# EAGLE board PCB_proiect (EAGLE 9.7.0)
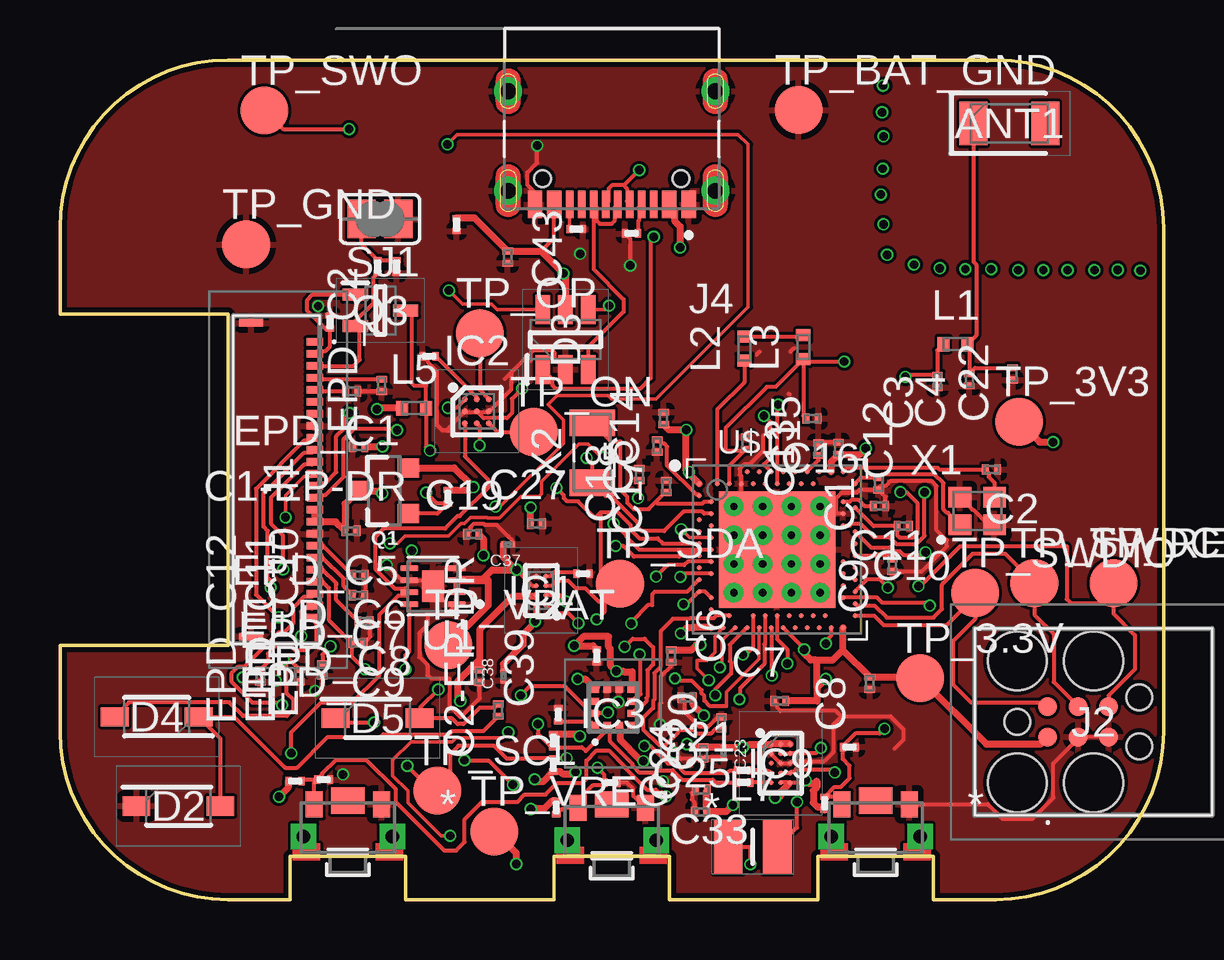
[diagram p0: board, top side]
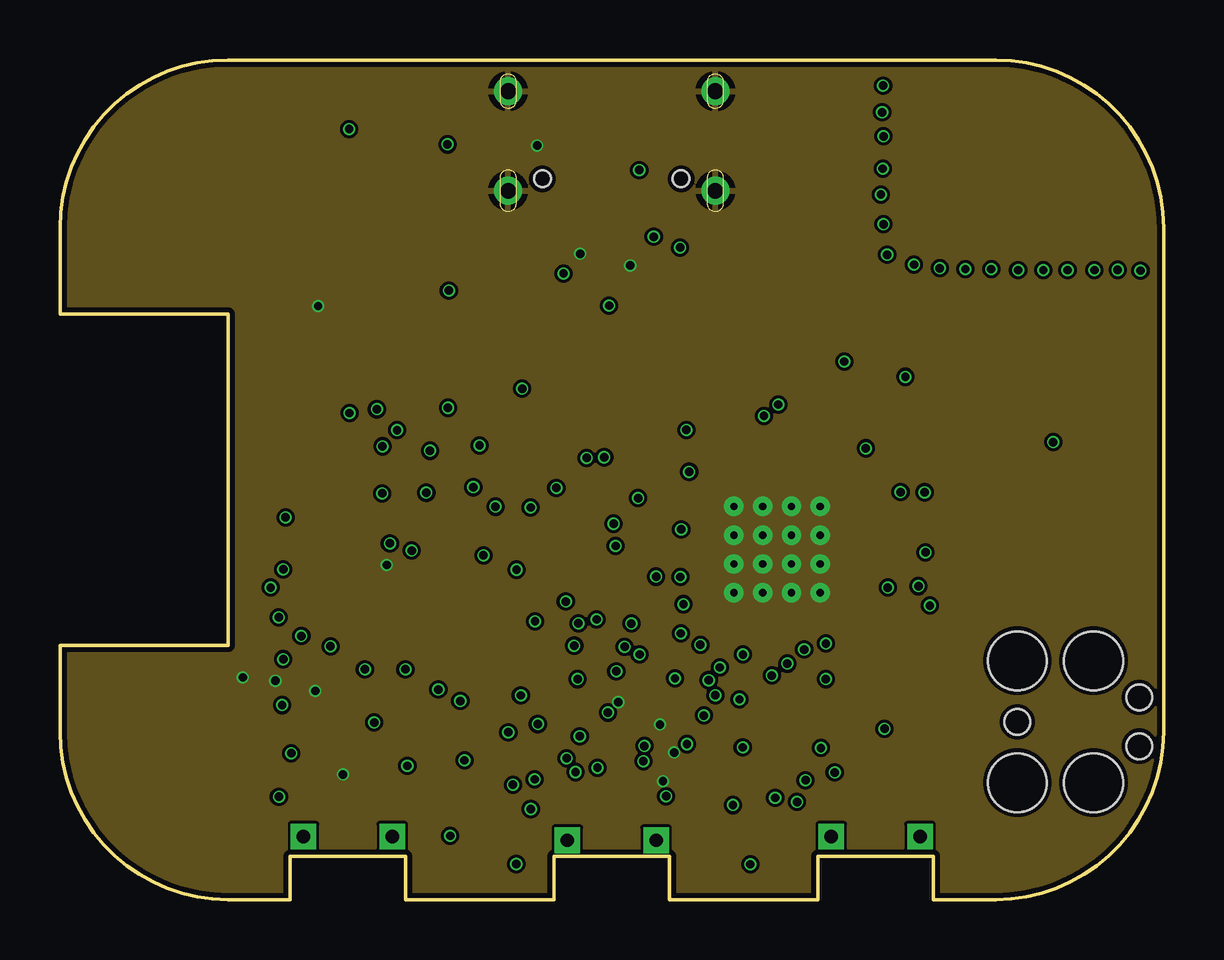
[diagram p1: board, inner layer Route2]
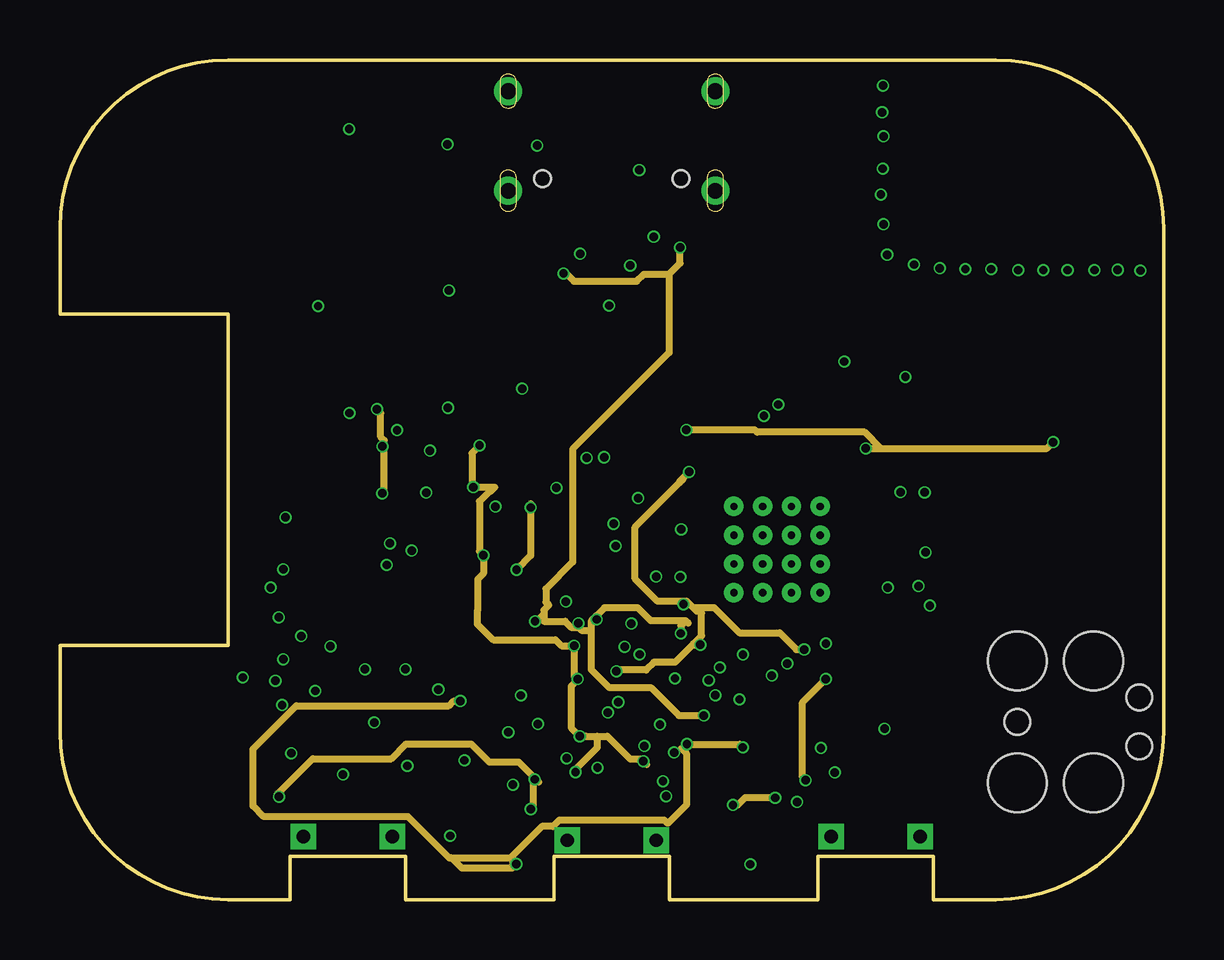
[diagram p2: board, inner layer Route15]
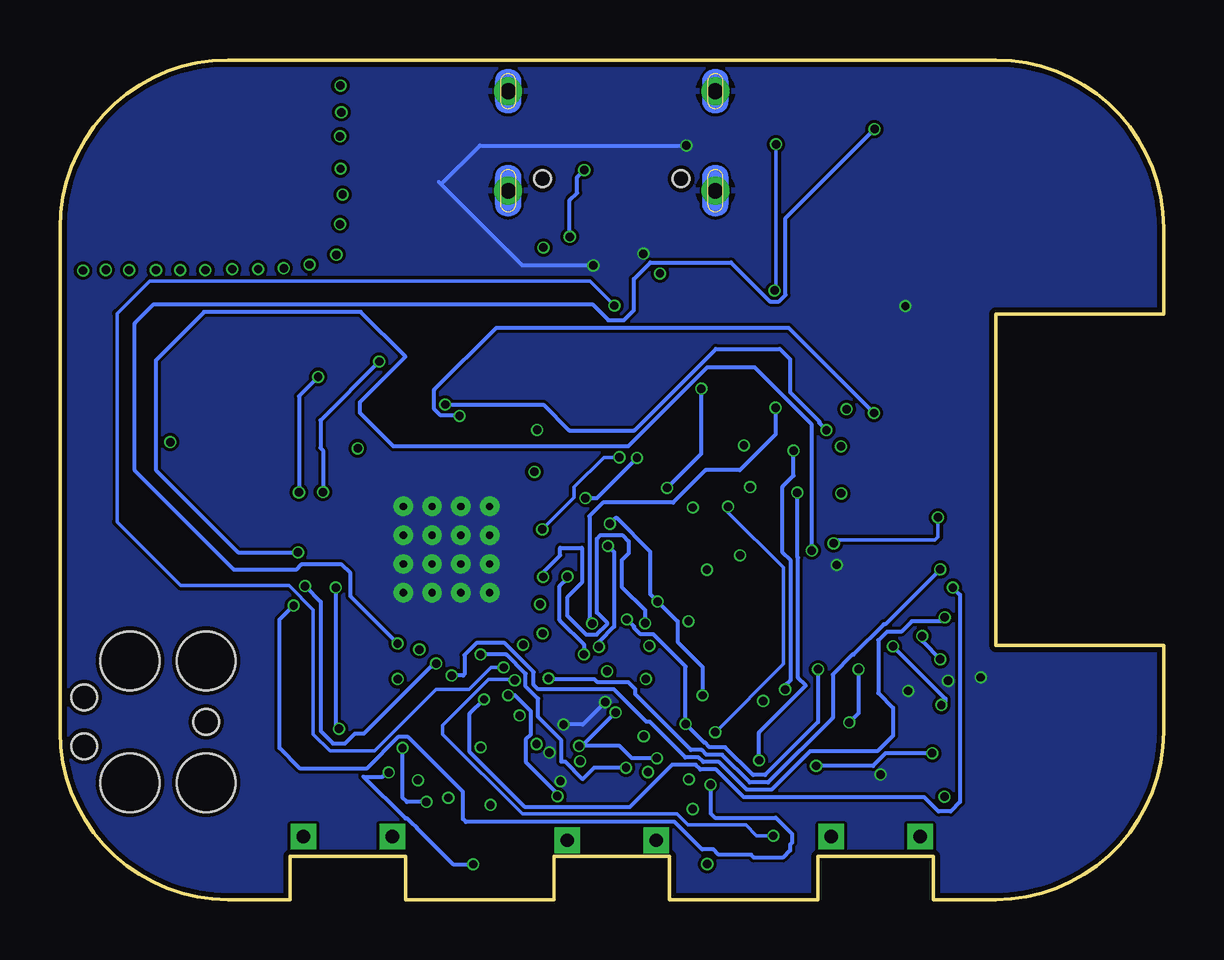
[diagram p3: board, bottom side, seen from below]

Size 46 x 35 mm. Coordinates in mm from the lower left corner, seen from the top.
Outline: 7,35 arc90 0,28 0,24.4 7,24.4 7,10.6 0,10.6 0,7 arc90 7,0 9.6,0 9.6,1.8 14.4,1.8 14.4,0 20.6,0 20.6,1.8 25.4,1.8 25.4,0 31.6,0 31.6,1.8 36.4,1.8 36.4,0 39,0 arc90 46,7 46,28 arc90 39,35 7,35
Copper layers (1*16): Top 0.035mm / dielectric 1.6mm / Bottom 0.035mm
Design rules "jlcpcb-2layers": minimum track width 5mil, minimum drill 0.3mm, track to track 5mil, track to pad 5mil, pad to pad 5mil, via to via 5mil, smd to smd 5mil, copper to edge 0.2mm, drill to drill 6mil, minimum pad ring 10mil, minimum via ring 3mil, stop-mask expansion 4mil, vias tented up to drill 0mil, thermal gap 10mil

## Footprints (pad centres in the part's own frame; a part is rotated, then mirrored left to right if it is on the bottom)
2450AT18B100E_ANTC3216X140N = smd 1.15 x 1.8: 1 -1.5,0; 2 1.5,0
NORDIC_NRF_3_RESC0201_L = smd 0.28 x 0.43: 1 -0.255,0; 2 0.255,0
GRM011R60J152KE01L_2_CAPC0201X13N = smd 0.22 x 0.23: 1 -0.185,0; 2 0.185,0
GRM011R60J152KE01L_1_0201 = smd 0.35 x 0.25: 1 0,0.275; 2 0,-0.275
ESP32_C6_LIBRARY_5_SOD3716X135N = smd 1.15 x 0.8: 1 -1.75,0; 2 1.75,0
ESP32_C6_LIBRARY_3_SOT95P280X145-6N = smd 1.2 x 0.6: 1 -1.25,0.95; 2 -1.25,0; 3 -1.25,-0.95; 4 1.25,-0.95; 5 1.25,0; 6 1.25,0.95
BQ25180YBGR_BGA8C40P2X4_100X155X50 = smd 0.2 x 0.2: A1 -0.2,0.6; A2 0.2,0.6; B1 -0.2,0.2; B2 0.2,0.2; C1 -0.2,-0.2; C2 0.2,-0.2; D1 -0.2,-0.6; D2 0.2,-0.6
DRV2605YZFR_BGA9C50P3X3_144X144X62 = smd 0.25 x 0.25: A1 -0.5,0.5; A2 0,0.5; A3 0.5,0.5; B1 -0.5,0; B2 0,0; B3 0.5,0; C1 -0.5,-0.5; C2 0,-0.5; C3 0.5,-0.5
BMA423_BMA423 = smd 0.3 x 0.35: 1 -0.75,-0.775; 2 -0.25,-0.775; 3 0.25,-0.775; 4 0.75,-0.775; 7 0.75,0.775; 8 0.25,0.775; 9 -0.25,0.775; 10 -0.75,0.775 | smd 0.35 x 0.3: 5 0.775,-0.25; 6 0.775,0.25; 11 -0.775,0.25; 12 -0.775,-0.25
RT6160AWSC_BGA15C40P3X5_140X230X60 = smd 0.216 x 0.216: A1 -0.4,0.8; A2 0,0.8; A3 0.4,0.8; B1 -0.4,0.4; B2 0,0.4; B3 0.4,0.4; C1 -0.4,0; C2 0,0; C3 0.4,0; D1 -0.4,-0.4; D2 0,-0.4; D3 0.4,-0.4; E1 -0.4,-0.8; E2 0,-0.8; E3 0.4,-0.8
503480-2400_5034802400 = smd 0.3 x 0.7: 1 -5.75,1.525; 2 -5.25,1.525; 3 -4.75,1.525; 4 -4.25,1.525; 5 -3.75,1.525; 6 -3.25,1.525; 7 -2.75,1.525; 8 -2.25,1.525; 9 -1.75,1.525; 10 -1.25,1.525; 11 -0.75,1.525; 12 -0.25,1.525; 13 0.25,1.525; 14 0.75,1.525; 15 1.25,1.525; 16 1.75,1.525; 17 2.25,1.525; 18 2.75,1.525; 19 3.25,1.525; 20 3.75,1.525; 21 4.25,1.525; 22 4.75,1.525; 23 5.25,1.525; 24 5.75,1.525 | smd 0.3 x 1: MP1 -6.54,-1.125; MP2 6.54,-1.125
TC2030-IDC_TC2030IDC = smd 0.783 x 0.783: 1 -0.953,-0.635; 2 -0.953,0.635; 3 0.317,-0.635; 4 0.317,0.635; 5 1.588,-0.635; 6 1.588,0.635 | hole 2.451: -2.223,-2.54; -2.223,2.54; 0.952,-2.54; 0.952,2.54 | hole 1.067: -2.223,0; 2.857,-1.016; 2.857,1.016
KH-TYPE-C-16P_KINGHELM_KH-TYPE-C-16P = smd 0.6 x 1.15: A1_B12 -3.2,4.725; A4_B9 -2.4,4.725; A9_B4 2.4,4.725; A12_B1 3.2,4.725 | smd 0.3 x 1.15: A5 -1.25,4.725; A6 -0.25,4.725; A7 0.25,4.725; A8 1.25,4.725; B5 1.75,4.725; B6 0.75,4.725; B7 -0.75,4.725; B8 -1.75,4.725 | drill 0.65 pad 1.05: SH1 -4.32,0; SH2 4.32,0; SH3 -4.32,4.15; SH4 4.32,4.15 | hole 0.7: -2.89,3.65; 2.89,3.65
NORDIC_NRF_2_RESC0402_L = smd 0.5 x 0.6: 1 -0.5,0; 2 0.5,0
MLP2016SR47MT0S1_INDC2016X100N = smd 1.2 x 2.2: 1 -1.028,0; 2 1.028,0
ESP32_C6_LIBRARY_4_ESP32_C6_LIBRARY_4_ESP32_C6_LIBRARY_4_ESP32_C6_LIBRARY_4_ESP32_WROVER_SPARKFUN-DISCRETESEMI_SOT23-3 = smd 0.8 x 0.9: 1 -0.95,-1; 2 0.95,-1; 3 0,1.1
ESP32_C6_LIBRARY_6_SOT65P210X110-3N = smd 1.05 x 0.5: 1 -1.05,0.65; 2 -1.05,-0.65; 3 1.05,0
ERA-1AEB3401C_0201 = smd 0.35 x 0.25: 1 0,0.275; 2 0,-0.275
CPF0201D7K68C1_0201 = smd 0.35 x 0.25: 1 0,0.275; 2 0,-0.275
ESP32_C6_LIBRARY_7_JUMPER_SJ = smd 1.168 x 1.6: 1 -0.762,0; 2 0.762,0
2025-10-22_07-23-44_LIBRARY_SW_EVP-AKE31A_PAN = smd 0.711 x 1.092: 1 -1.4,-0.972; 2 1.4,-0.972 | drill 0.559 pad 0.914 square: 3 -1.848,0.381; 4 1.848,0.381 | smd 1.397 x 1.092: 5 0,-1.124
HECTOR_WATCH_1_TP20R = smd 2 x 2: TP 0,0
ESP32_C6_LIBRARY_SON50P200X200X80-9N = smd 0.76 x 0.27: 1 -0.985,0.75; 2 -0.985,0.25; 3 -0.985,-0.25; 4 -0.985,-0.75; 5 0.985,-0.75; 6 0.985,-0.25; 7 0.985,0.25; 8 0.985,0.75 | smd 0.9 x 1.3: 9 0,0
NORDIC_NRF_4_AQFN50P700X700X85_HS-74N = smd 4.85 x 4.85: P$74 0,0 | drill 0.3 pad 0.6: P$75 -1.8,1.8; P$76 -0.6,1.8; P$77 0.6,1.8; P$78 1.8,1.8; P$79 -1.8,0.6; P$80 -0.6,0.6; P$81 0.6,0.6; P$82 1.8,0.6; P$83 -1.8,-0.6; P$84 -0.6,-0.6; P$85 0.6,-0.6; P$86 1.8,-0.6; P$87 -1.8,-1.8; P$88 -0.6,-1.8; P$89 0.6,-1.8; P$90 1.8,-1.8 | smd 0.2 x 0.2: P$A8 -1.25,3.25; P$A10 -0.75,3.25; P$A12 -0.25,3.25; P$A14 0.25,3.25; P$A16 0.75,3.25; P$A18 1.25,3.25; P$A20 1.75,3.25; P$A22 2.25,3.25; P$A23 2.75,3.25; P$AA24 3.25,-2.25; P$AB2 -2.75,-2.5; P$AC5 -2,-2.75; P$AC9 -1,-2.75; P$AC11 -0.5,-2.75; P$AC13 0,-2.75; P$AC15 0.5,-2.75; P$AC17 1,-2.75; P$AC19 1.5,-2.75; P$AC21 2,-2.75; P$AC24 3.25,-2.75; P$AD2 -2.75,-3.25; P$AD4 -2.25,-3.25; P$AD6 -1.75,-3.25; P$AD8 -1.25,-3.25; P$AD10 -0.75,-3.25; P$AD12 -0.25,-3.25; P$AD14 0.25,-3.25; P$AD16 0.75,-3.25; P$AD18 1.25,-3.25; P$AD20 1.75,-3.25; P$AD22 2.25,-3.25; P$AD23 2.75,-3.25; P$B1 -3.25,2.75; P$B3 -2.5,2.75; P$B5 -2,2.75; P$B7 -1.5,2.75; P$B9 -1,2.75; P$B11 -0.5,2.75; P$B13 0,2.75; P$B15 0.5,2.75; P$B17 1,2.75; P$B19 1.5,2.75; P$B24 3.25,2.75; P$C1 -3.25,2.25; P$D2 -2.75,2; P$D23 2.75,2; P$E24 3.25,1.75; P$F2 -2.75,1.5; P$F23 2.75,1.5; P$G1 -3.25,1.25; P$H2 -2.75,1; P$H23 2.75,1; P$J1 -3.25,0.75; P$J24 3.25,0.75; P$K2 -2.75,0.5; P$L1 -3.25,0.25; P$L24 3.25,0.25; P$M2 -2.75,0; P$N1 -3.25,-0.25; P$N24 3.25,-0.25; P$P2 -2.75,-0.5; P$P23 2.75,-0.5; P$R1 -3.25,-0.75; P$R24 3.25,-0.75; P$T2 -2.75,-1; P$T23 2.75,-1; P$U1 -3.25,-1.25; P$U24 3.25,-1.25; P$V23 2.75,-1.5; P$W1 -3.25,-1.75; P$W24 3.25,-1.75; P$Y2 -2.75,-2; P$Y23 2.75,-2
NORDIC_NRF_BT-XTAL_2016_N = smd 0.95 x 0.85: 1 -0.725,-0.575; 2 0.725,-0.575; 3 0.725,0.575; 4 -0.725,0.575
XTAL_ABS07-32.768KHZ-T = smd 1.1 x 1.9: 1 -1.25,0; 2 1.25,0

## Placement (x,y rotation side)
ANT1  2450AT18B100E_2450AT18B100E  [2450AT18B100E_ANTC3216X140N]  39.57,32.36 0 top
C1  12pF  [NORDIC_NRF_3_RESC0201_L]  34.12,17.33 90 top
C1-EP-DR  10uF  [NORDIC_NRF_3_RESC0201_L]  12.45,18.88 180 top
C2  12pF  [NORDIC_NRF_3_RESC0201_L]  38.83,17.93 180 top
C2-EP-DR  4.7uF/25V  [NORDIC_NRF_3_RESC0201_L]  18.27,7.9 90 top
C3  1pF  [NORDIC_NRF_3_RESC0201_L]  36.57,21.6 90 top
C4  1pF  [NORDIC_NRF_3_RESC0201_L]  37.9,21.67 90 top
C5  100nF  [NORDIC_NRF_3_RESC0201_L]  24.89,18.91 90 top
C6  4.7µF  [NORDIC_NRF_3_RESC0201_L]  25.48,10.15 270 top
C7  100nF  [NORDIC_NRF_3_RESC0201_L]  30,8.28 0 top
C8  100nF  [NORDIC_NRF_3_RESC0201_L]  33.75,9.02 90 top
C9  820pF  [NORDIC_NRF_3_RESC0201_L]  34.7,13.93 90 top
C10  N.C.  [NORDIC_NRF_3_RESC0201_L]  35.15,15.57 180 top
C11  100pF  [NORDIC_NRF_3_RESC0201_L]  34.16,16.41 180 top
C12  100nF  [NORDIC_NRF_3_RESC0201_L]  32.45,18.81 270 top
C13  N.C.  [NORDIC_NRF_3_RESC0201_L]  31.62,18.78 90 top
C14  4.7µF  [NORDIC_NRF_3_RESC0201_L]  25.16,20.06 90 top
C15  1.0µF  [NORDIC_NRF_3_RESC0201_L]  28.6,19.03 270 top
C16  47nF  [NORDIC_NRF_3_RESC0201_L]  31.35,20.05 180 top
C17  12pF  [NORDIC_NRF_3_RESC0201_L]  25.27,17.22 90 top
C18  12pF  [NORDIC_NRF_3_RESC0201_L]  24.15,17.72 90 top
C19  100nF  [NORDIC_NRF_3_RESC0201_L]  17.2,15.23 0 top
C20  4.7µF  [NORDIC_NRF_3_RESC0201_L]  27.57,7.36 90 top
C21  100nF  [NORDIC_NRF_3_RESC0201_L]  26.14,8.42 180 top
C22  N.C.  [NORDIC_NRF_3_RESC0201_L]  39.71,21.91 90 top
C23  0.1uF  [GRM011R60J152KE01L_2_CAPC0201X13N]  27.67,6.14 270 top
C24  10uF  [NORDIC_NRF_3_RESC0201_L]  26.82,6.11 90 top
C25  22uF  [NORDIC_NRF_3_RESC0201_L]  26.7,3.66 0 top
C27  0.1uF  [NORDIC_NRF_3_RESC0201_L]  19.86,15.67 0 top
C29  1uF  [GRM011R60J152KE01L_1_0201]  32.91,6.36 270 top
C30  1uF  [GRM011R60J152KE01L_1_0201]  10.99,5 270 top
C31  1uF  [GRM011R60J152KE01L_1_0201]  22.97,4.87 270 top
C32  1uF  [GRM011R60J152KE01L_1_0201]  15.39,22.65 90 top
C33  22uF  [NORDIC_NRF_3_RESC0201_L]  26.73,4.58 180 top
C34  0.1uF  [GRM011R60J152KE01L_1_0201]  22.37,10.16 180 top
C37  1uF  [GRM011R60J152KE01L_2_CAPC0201X13N]  18.67,14.82 180 top
C38  1uF  [GRM011R60J152KE01L_2_CAPC0201X13N]  18.49,9.31 90 top
C39  10uF  [NORDIC_NRF_3_RESC0201_L]  17.49,9.31 270 top
C42  0.1uF  [GRM011R60J152KE01L_1_0201]  16.53,28.14 0 top
C43  4.7uF  [NORDIC_NRF_3_RESC0201_L]  18.66,26.78 270 top
D2  ESP32_C6_LIBRARY_5_MBR0530  [ESP32_C6_LIBRARY_5_SOD3716X135N]  4.94,3.9 0 top
D3  ESP32_C6_LIBRARY_3_USBLC6-2SC6Y  [ESP32_C6_LIBRARY_3_SOT95P280X145-6N]  21.07,23.34 90 top
D4  ESP32_C6_LIBRARY_5_MBR0530  [ESP32_C6_LIBRARY_5_SOD3716X135N]  4.03,7.62 180 top
D5  ESP32_C6_LIBRARY_5_MBR0530  [ESP32_C6_LIBRARY_5_SOD3716X135N]  13.24,7.56 0 top
EPD_C1  1uF/50V  [NORDIC_NRF_3_RESC0201_L]  12.16,21.19 180 top
EPD_C2  1uF/50V  [NORDIC_NRF_3_RESC0201_L]  13.41,21.43 90 top
EPD_C5  0.1uF/50V  [NORDIC_NRF_3_RESC0201_L]  12.13,15.37 180 top
EPD_C6  1uF/50V  [NORDIC_NRF_3_RESC0201_L]  12.46,13.52 180 top
EPD_C7  1uF/50V  [NORDIC_NRF_3_RESC0201_L]  12.45,12.68 179.3 top
EPD_C8  1uF/50V  [NORDIC_NRF_3_RESC0201_L]  12.67,11.59 180 top
EPD_C9  1uF/50V  [NORDIC_NRF_3_RESC0201_L]  12.42,10.7 180 top
EPD_C10  1uF/50V  [NORDIC_NRF_3_RESC0201_L]  10.94,9.58 90 top
EPD_C11  1uF/50V  [NORDIC_NRF_3_RESC0201_L]  9.98,9.33 90 top
EPD_C12  1uF/50V  [NORDIC_NRF_3_RESC0201_L]  8.35,9.32 90 top
IC1  BQ25180YBGR_BQ25180YBGR  [BQ25180YBGR_BGA8C40P2X4_100X155X50]  20.06,12.88 180 top
IC2  DRV2605YZFR_DRV2605YZFR  [DRV2605YZFR_BGA9C50P3X3_144X144X62]  17.38,20.35 0 top
IC3  BMA423_BMA423  [BMA423_BMA423]  23.06,8.01 0 top
IC9  RT6160AWSC_RT6160AWSC  [RT6160AWSC_BGA15C40P3X5_140X230X60]  30.04,5.68 0 top
J1  503480-2400_503480-2400  [503480-2400_5034802400]  9.1,17.5 270 top
J2  TC2030-IDC_TC2030-IDC  [TC2030-IDC_TC2030IDC]  42.13,7.41 0 top
J4  KH-TYPE-C-16P_KH-TYPE-C-16P  [KH-TYPE-C-16P_KINGHELM_KH-TYPE-C-16P]  23,33.7 180 top
L1  3.9nH  [NORDIC_NRF_2_RESC0402_L]  37.33,23.15 0 top
L2  10µH  [NORDIC_NRF_2_RESC0402_L]  28.53,22.97 90 top
L3  15nH  [NORDIC_NRF_2_RESC0402_L]  30.98,23.03 90 top
L5  68uH  [NORDIC_NRF_2_RESC0402_L]  14.76,20.48 0 top
L7  MLP2016SR47MT0S1_FTC252012SR47MBCA  [MLP2016SR47MT0S1_INDC2016X100N]  28.88,2.19 180 top
Q1  20V/4.2A/52mΩ/1.4W  [ESP32_C6_LIBRARY_4_ESP32_C6_LIBRARY_4_ESP32_C6_LIBRARY_4_ESP32_C6_LIBRARY_4_ESP32_WROVER_SPARKFUN-DISCRETESEMI_SOT23-3]  13.52,17.04 90 top
Q3  ESP32_C6_LIBRARY_6_SI1308EDL-T1-GE3  [ESP32_C6_LIBRARY_6_SOT65P210X110-3N]  13.36,24.56 0 top
R1  0  [ERA-1AEB3401C_0201]  28.5,5.38 90 top
R1_EP_DR  0.47  [CPF0201D7K68C1_0201]  13.24,26.38 0 top
R1_PWR_EPD  10K  [CPF0201D7K68C1_0201]  16.16,16.79 180 top
R1_USB  5K1  [CPF0201D7K68C1_0201]  23.82,27.77 90 top
R2  0  [ERA-1AEB3401C_0201]  28.5,4.88 90 top
R2_EP_DR  10K  [CPF0201D7K68C1_0201]  11.26,24.07 0 top
R2_USB  5K1  [CPF0201D7K68C1_0201]  21.52,27.95 90 top
R3  0  [ERA-1AEB3401C_0201]  20.77,7.71 0 top
R5  10k  [CPF0201D7K68C1_0201]  9.8,4.94 270 top
R7  10k  [CPF0201D7K68C1_0201]  31.88,4.01 0 top
R8  10k  [CPF0201D7K68C1_0201]  20.69,3.83 180 top
R9  10K  [ERA-1AEB3401C_0201]  21.8,13.58 270 top
R17  3K3  [ERA-1AEB3401C_0201]  20.56,5.61 180 top
R18  3K3  [ERA-1AEB3401C_0201]  20.56,6.63 0 top
R_TYPE_SEL  2.2  [CPF0201D7K68C1_0201]  14.03,26.38 180 top
SJ1  0  [ESP32_C6_LIBRARY_7_JUMPER_SJ]  13.34,28.37 180 top
SW_DN  2025-10-22_07-23-44_LIBRARY_EVP-AKE31ASW_EVP-AKE31A_PAN  [2025-10-22_07-23-44_LIBRARY_SW_EVP-AKE31A_PAN]  34,3 180 top
SW_ENT  2025-10-22_07-23-44_LIBRARY_EVP-AKE31ASW_EVP-AKE31A_PAN  [2025-10-22_07-23-44_LIBRARY_SW_EVP-AKE31A_PAN]  23,2.85 180 top
SW_UP  2025-10-22_07-23-44_LIBRARY_EVP-AKE31ASW_EVP-AKE31A_PAN  [2025-10-22_07-23-44_LIBRARY_SW_EVP-AKE31A_PAN]  12,3 180 top
TP_3.3V  HECTOR_WATCH_1_TPTP20R  [HECTOR_WATCH_1_TP20R]  35.86,9.22 0 top
TP_3V3  HECTOR_WATCH_1_TPTP20R  [HECTOR_WATCH_1_TP20R]  39.98,19.92 0 top
TP_BAT_GND  HECTOR_WATCH_1_TPTP20R  [HECTOR_WATCH_1_TP20R]  30.79,32.91 0 top
TP_GND  HECTOR_WATCH_1_TPTP20R  [HECTOR_WATCH_1_TP20R]  7.76,27.31 0 top
TP_ON  HECTOR_WATCH_1_TPTP20R  [HECTOR_WATCH_1_TP20R]  19.75,19.49 0 top
TP_OP  HECTOR_WATCH_1_TPTP20R  [HECTOR_WATCH_1_TP20R]  17.5,23.61 0 top
TP_RESET  HECTOR_WATCH_1_TPTP20R  [HECTOR_WATCH_1_TP20R]  43.91,13.19 0 top
TP_SCL  HECTOR_WATCH_1_TPTP20R  [HECTOR_WATCH_1_TP20R]  15.73,4.54 0 top
TP_SDA  HECTOR_WATCH_1_TPTP20R  [HECTOR_WATCH_1_TP20R]  23.34,13.17 0 top
TP_SWDCLK  HECTOR_WATCH_1_TPTP20R  [HECTOR_WATCH_1_TP20R]  40.62,13.19 0 top
TP_SWDIO  HECTOR_WATCH_1_TPTP20R  [HECTOR_WATCH_1_TP20R]  38.15,12.78 0 top
TP_SWO  HECTOR_WATCH_1_TPTP20R  [HECTOR_WATCH_1_TP20R]  8.53,32.89 0 top
TP_VBAT  HECTOR_WATCH_1_TPTP20R  [HECTOR_WATCH_1_TP20R]  16.19,10.61 0 top
TP_VREG  HECTOR_WATCH_1_TPTP20R  [HECTOR_WATCH_1_TP20R]  18.11,2.84 0 top
U1  ESP32_C6_LIBRARY_MAX17048G+T10  [ESP32_C6_LIBRARY_SON50P200X200X80-9N]  15.55,13.06 180 top
U$1  NORDIC_NRF_4_NRF52840_QF  [NORDIC_NRF_4_AQFN50P700X700X85_HS-74N]  29.89,14.59 0 top
X1  32MHZ  [NORDIC_NRF_BT-XTAL_2016_N]  38.23,16.2 0 top
X2  ABSO7  [XTAL_ABS07-32.768KHZ-T]  22.18,18.63 90 top

## Library data of the parts
ANT1 = InkTime_v5; ARROW_PART_NUMBER: 2450AT18B100E; ARROW_PRICE-STOCK: https://www.arrow.com/en/products/2450at18b100e/johanson-dielectrics?utm_currency=USD&region=nac; DESCRIPTION: Antennas 2.45GHz ANTENNA; HEIGHT: 1.4mm; MANUFACTURER_NAME: JOHANSON TECHNOLOGY; MANUFACTURER_PART_NUMBER: 2450AT18B100E; MOUSER_PART_NUMBER: 609-2450AT18B100E; MOUSER_PRICE-STOCK: https://www.mouser.co.uk/ProductDetail/Johanson-Technology/2450AT18B100E?qs=yCnrNFeXz%252Bh5MFsFIXGZGA%3D%3D
C1 C1-EP-DR C2 C2-EP-DR C3-C22 C24 C25 C27 C29-C34 C39 C42 C43 EPD_C1 EPD_C2 EPD_C5-EPD_C12 L1-L3 L5 R1 R1_EP_DR R1_PWR_EPD R1_USB R2 R2_EP_DR R2_USB R3 R5 R7-R9 R17 R18 R_TYPE_SEL SJ1 TP_3.3V TP_3V3 TP_BAT_GND TP_GND TP_ON TP_OP TP_RESET TP_SCL TP_SDA TP_SWDCLK TP_SWDIO TP_SWO TP_VBAT TP_VREG U$1 X1 = InkTime_v5
C23 C37 C38 = InkTime_v5; AVAILABILITY: In Stock; CHECK_PRICES: https://www.snapeda.com/parts/GRM011R60J152KE01L/Murata/view-part/?ref=eda; DESCRIPTION: SMD Capacitor X5R(EIA) with Capacitance: 1500pF Tol. 10%. Rated Voltage: 6.3Vdc; MF: Murata; MP: GRM011R60J152KE01L; PACKAGE: 0201 Murata; PRICE: None; SNAPEDA_LINK: https://www.snapeda.com/parts/GRM011R60J152KE01L/Murata/view-part/?ref=snap
D2 D4 D5 = InkTime_v5; AVAILABILITY: In Stock; CHECK_PRICES: https://www.snapeda.com/parts/MBR0530/Onsemi/view-part/?ref=eda; DESCRIPTION: Diode Schottky 30 V 500mA Surface Mount SOD-123; MF: ON Semiconductor; MP: MBR0530; PACKAGE: SOD-123-2 ON Semiconductor; PRICE: None; PURCHASE-URL: https://www.snapeda.com/api/url_track_click_mouser/?unipart_id=179458&manufacturer=ON Semiconductor&part_name=MBR0530&search_term=None; SNAPEDA_LINK: https://www.snapeda.com/parts/MBR0530/Onsemi/view-part/?ref=snap
D3 = InkTime_v5; AVAILABILITY: In Stock; CHECK_PRICES: https://www.snapeda.com/parts/USBLC6-2SC6Y/STMicroelectronics/view-part/?ref=eda; DESCRIPTION: 17V Clamp 5A (8/20µs) Ipp Tvs Diode Surface Mount SOT-23-6; MF: STMicroelectronics; MP: USBLC6-2SC6Y; PACKAGE: SOT-23-6 STMicroelectronics; PRICE: None; SNAPEDA_LINK: https://www.snapeda.com/parts/USBLC6-2SC6Y/STMicroelectronics/view-part/?ref=snap
IC1 = InkTime_v5; ARROW_PART_NUMBER: BQ25180YBGR; ARROW_PRICE-STOCK: https://www.arrow.com/en/products/bq25180ybgr/texas-instruments?utm_currency=USD&region=nac; DESCRIPTION: Charger IC Lithium Ion/Polymer, Lithium Iron Phosphate 8-DSBGA (1.6x1.1); HEIGHT: 0.5mm; MANUFACTURER_NAME: Texas Instruments; MANUFACTURER_PART_NUMBER: BQ25180YBGR; MOUSER_PART_NUMBER: 595-BQ25180YBGR; MOUSER_PRICE-STOCK: https://www.mouser.co.uk/ProductDetail/Texas-Instruments/BQ25180YBGR?qs=doiCPypUmgEWjAK%252BJAX6Tw%3D%3D
IC2 = InkTime_v5; ARROW_PART_NUMBER: DRV2605YZFR; ARROW_PRICE-STOCK: https://www.arrow.com/en/products/drv2605yzfr/texas-instruments?region=nac; DESCRIPTION: Haptic Driver for ERM/LRA with Built-In Library and Smart Loop Architecture; HEIGHT: 0.625mm; MANUFACTURER_NAME: Texas Instruments; MANUFACTURER_PART_NUMBER: DRV2605YZFR
IC3 = InkTime_v5; ARROW_PART_NUMBER: BMA423; ARROW_PRICE-STOCK: https://www.arrow.com/en/products/bma423/bosch; DESCRIPTION: Accelerometers Triaxial low-g 12bit Acceleration Sensor; HEIGHT: 1mm; MANUFACTURER_NAME: BOSCH; MANUFACTURER_PART_NUMBER: BMA423; MOUSER_PART_NUMBER: 262-BMA423; MOUSER_PRICE-STOCK: https://www.mouser.co.uk/ProductDetail/Bosch-Sensortec/BMA423?qs=HXFqYaX1Q2xC%252BSgeGoX3mg%3D%3D
IC9 = InkTime_v5; DESCRIPTION: Buck-Boost Regulator Positive Output Step-Up/Step-Down I2C DC-DC Controller IC 15-WL-CSP (BSC) (1.4x2.3); HEIGHT: 0.6mm; MANUFACTURER_NAME: RICHTEK; MANUFACTURER_PART_NUMBER: RT6160AWSC; MOUSER_PART_NUMBER: 835-RT6160AWSC; MOUSER_PRICE-STOCK: https://www.mouser.co.uk/ProductDetail/Richtek/RT6160AWSC?qs=amGC7iS6iy%2FLd9PSoixZXQ%3D%3D
J1 = InkTime_v5; DESCRIPTION: FFC & FPC Connectors 0.5mm FPC RA SMT Dual Contact 24Ckt; HEIGHT: 1.87mm; MANUFACTURER_NAME: Molex; MANUFACTURER_PART_NUMBER: 503480-2400; MOUSER_PART_NUMBER: 538-503480-2400; MOUSER_PRICE-STOCK: https://www.mouser.co.uk/ProductDetail/Molex/503480-2400?qs=OAhjpuo3Vu7efIoxFh9AOw%3D%3D
J2 = InkTime_v5; DESCRIPTION: CABLE ADAPTER 6 POS; HEIGHT: 19mm; MANUFACTURER_NAME: Tag Connect; MANUFACTURER_PART_NUMBER: TC2030-IDC
J4 = InkTime_v5; AVAILABILITY: Not in stock; CHECK_PRICES: https://www.snapeda.com/parts/KH-TYPE-C-16P/Kinghelm/view-part/?ref=eda; MF: kinghelm; MP: KH-TYPE-C-16P; PACKAGE: None; PRICE: None; SNAPEDA_LINK: https://www.snapeda.com/parts/KH-TYPE-C-16P/Kinghelm/view-part/?ref=snap
L7 = InkTime_v5; DESCRIPTION: SMD / SMT Inductors (Coils), L=0.47?H, L x W x T :; HEIGHT: 1mm; JLCPCB: https://jlcpcb.com/partdetail/6763488-FTC252012SR47MBCA/C5832368; MANUFACTURER_NAME: TDK; MANUFACTURER_PART_NUMBER: FTC252012SR47MBCA
Q1 = InkTime_v5; PROD_ID: TRAN-14388
Q3 = InkTime_v5; AVAILABILITY: In Stock; CHECK_PRICES: https://www.snapeda.com/parts/SI1308EDL-T1-GE3/Vishay+Siliconix/view-part/?ref=eda; DESCRIPTION: Si1308EDL-T1-GE3 N-channel MOSFET Transistor, 1.5 A, 30 V, 3-Pin SC-70 | Siliconix / Vishay SI1308EDL-T1-GE3; MF: Vishay Siliconix; MP: SI1308EDL-T1-GE3; PACKAGE: SOT-323 Vishay Semiconductor; PRICE: None; PURCHASE-URL: https://www.snapeda.com/api/url_track_click_mouser/?unipart_id=274603&manufacturer=Vishay Siliconix&part_name=SI1308EDL-T1-GE3&search_term=None; SNAPEDA_LINK: https://www.snapeda.com/parts/SI1308EDL-T1-GE3/Vishay+Siliconix/view-part/?ref=snap
SW_DN SW_ENT SW_UP = InkTime_v5; COPYRIGHT: Copyright (C) 2025 Ultra Librarian. All rights reserved.; DIGI-KEY_PART_NUMBER_1: P123437TR-ND; DIGI-KEY_PART_NUMBER_2: P123437CT-ND; DIGI-KEY_PART_NUMBER_3: P123437DKR-ND; MANUFACTURER_NAME: Panasonic; MANUFACTURER_PART_NUMBER: EVP-AKE31A
U1 = InkTime_v5; AVAILABILITY: In Stock; CHECK_PRICES: https://www.snapeda.com/parts/MAX17048G+T10/Analog+Devices/view-part/?ref=eda; DESCRIPTION: 3µA 1-Cell/2-Cell Fuel Gauge with ModelGauge; MF: Analog Devices; MP: MAX17048G+T10; PACKAGE: TDFN-8 Maxim; PRICE: None; PURCHASE-URL: https://www.snapeda.com/api/url_track_click_mouser/?unipart_id=329239&manufacturer=Analog Devices&part_name=MAX17048G+T10&search_term=None; SNAPEDA_LINK: https://www.snapeda.com/parts/MAX17048G+T10/Analog+Devices/view-part/?ref=snap
X2 = Frequency-Source; CATEGORY: Crystal; DATASHEET: https://abracon.com/Resonators/ABS07.pdf; DESCRIPTION: 32.768 kHz ±20 ppm Crystal 12.5 pF 70 kOhms 2-SMD No Lead; FREQUENCY: 32.768 kHz; FREQUENCY_STABILITY: NA; LOAD_CAPACITANCE: 12.5 pF; MANUFACTURER: Abracon LLC; MPN: ABS07-32.768KHZ-T; OPERATING_TEMPERATURE: -40°C ~ 85°C; PACKAGE_SIZE: 2-SMD No Lead; PACKAGE_TYPE: Surface Mount; PART_STATUS: Active; ROHS: Compliant; SERIES: ABS07; SUBCATEGORY: Oscillators; TOLERANCE: ±20 ppm; TYPE: Resonators

## Nets
3V3: C6.1 C7.2 C8.2 C12.2 C14.1 C19.2 C25.2 C33.1 C34.2 IC2.C2 IC3.3 IC3.7 IC3.10 IC9.E2 IC9.E3 J2.1 Q1.2 R1_PWR_EPD.2 R5.2 R7.2 R8.2 R17.1 R18.1 TP_3.3V.TP TP_3V3.TP U$1.P$A22 U$1.P$AD14 U$1.P$AD23 U$1.P$B1 U$1.P$W1 U$1.P$Y2
ALERT: U1.5 U$1.P$J24
D+: D3.4 U$1.P$AD6
D-: D3.6 U$1.P$AD4
DN: D3.1 J4.A7 J4.B7
DP: D3.3 J4.A6 J4.B6
EPD_3V3: C1-EP-DR.1 EPD_C5.2 J1.15 J1.16 L5.1 Q1.3
EPD_BUSY: J1.9 U$1.P$AD12
EPD_CS: J1.12 U$1.P$K2
EPD_DC: J1.11 U$1.P$AD10
EPD_RST: J1.10 U$1.P$AC11
GDR: J1.2 Q3.1 R2_EP_DR.2
GND: C1-EP-DR.2 C1.1 C2.1 C3.1 C4.1 C5.1 C6.2 C7.1 C8.1 C9.1 C10.1 C11.1 C12.1 C13.2 C14.2 C15.1 C16.1 C17.2 C18.2 C19.1 C20.2 C21.2 C22.1 C23.2 C24.1 C25.1 C27.2 C29.1 C30.1 C31.1 C32.1 C33.2 C34.1 C37.1 C38.1 C39.2 C42.2 C43.2 D2.1 D3.2 EPD_C1.1 EPD_C2.1 EPD_C5.1 EPD_C6.1 EPD_C7.1 EPD_C8.1 EPD_C9.1 EPD_C10.1 EPD_C11.1 EPD_C12.1 IC1.D2 IC2.B1 IC2.B3 IC3.8 IC3.9 IC9.B1 IC9.C2 IC9.C3 J1.8 J1.17 J1.MP1 J1.MP2 J2.3 J2.5 J4.A1_B12 J4.A12_B1 J4.SH1 J4.SH2 J4.SH3 J4.SH4 R1_USB.1 R2_EP_DR.1 R2_USB.2 R3.1 R9.1 R_TYPE_SEL.1 SJ1.1 SW_DN.1 SW_ENT.1 SW_UP.1 TP_BAT_GND.TP TP_GND.TP U1.1 U1.4 U1.6 U1.9 U$1.P$74 U$1.P$75 U$1.P$76 U$1.P$77 U$1.P$78 U$1.P$79 U$1.P$80 U$1.P$81 U$1.P$82 U$1.P$83 U$1.P$84 U$1.P$85 U$1.P$86 U$1.P$87 U$1.P$88 U$1.P$89 U$1.P$90 U$1.P$B7 U$1.P$F23 X1.2 X1.4
HAPTIC_EN: IC2.A1 U$1.P$U1
IMU_INT1: IC3.5 U$1.P$N1
IMU_INT2: IC3.6 U$1.P$P2
LX1: IC9.B2 IC9.B3 L7.1
LX2: IC9.D2 IC9.D3 L7.2
MOSI: J1.14 U$1.P$B13
N$1: IC1.D1 R9.2
N$2: IC9.D1 R1.2
N$3: IC9.E1 R2.2
N$4: IC3.1 R3.2
N$5: C20.1 U$1.P$AC5
N$6: C2-EP-DR.2 D5.2 L5.2 Q3.3
N$7: C9.2 U$1.P$N24
N$8: C3.2 L1.1 U$1.P$H23
N$9: C11.2 U$1.P$D23
N$10: L2.1 U$1.P$B3
N$11: C2.2 U$1.P$A23 X1.3
N$12: C1.2 U$1.P$B24 X1.1
N$13: C13.1 U$1.P$A18
N$14: C10.2 C15.2 C16.2 L3.1 U$1.P$B5 U$1.P$E24
N$15: L2.2 L3.2
N$16: C5.2 U$1.P$C1
N$17: C17.1 U$1.P$D2 X2.2
N$18: C18.1 U$1.P$F2 X2.1
N$19: C2-EP-DR.1 D2.2 D4.1
N$20: R1_EP_DR.1 R_TYPE_SEL.2 SJ1.2
N$21: EPD_C2.2 J1.4
N$22: EPD_C6.2 J1.18
N$23: EPD_C1.2 J1.5
N$24: EPD_C7.2 J1.19
N$25: EPD_C8.2 J1.20
N$26: J4.A5 R1_USB.2
N$27: EPD_C10.2 J1.22
N$28: J4.B5 R2_USB.1
N$29: EPD_C12.2 J1.24
N$30: C32.2 IC2.A2
OUT+: IC2.A3 TP_OP.TP
OUT-: IC2.C3 TP_ON.TP
P0.04: U$1.P$J1
P0.09: U$1.P$L24
P0.13: C30.2 R5.1 SW_UP.2 U$1.P$AD8
P0.14: C31.2 R8.1 SW_ENT.2 U$1.P$AC9
P0.19: U$1.P$AC15
P0.20: U$1.P$AD16
P0.21: U$1.P$AC17
P0.22: U$1.P$AD18
P0.23: U$1.P$AC19
P0.24: U$1.P$AD20
P0.25: U$1.P$AC21
P0.26: U$1.P$G1
P0.27: U$1.P$H2
P0.28: U$1.P$B11
P0.29: U$1.P$A10
P0.30: U$1.P$B9
P0.31: U$1.P$A8
P1.01: Q1.1 R1_PWR_EPD.1 U$1.P$Y23
P1.02: C29.2 R7.1 SW_DN.2 U$1.P$W24
P1.03: U$1.P$V23
P1.04: U$1.P$U24
P1.05: U$1.P$T23
P1.06: U$1.P$R24
P1.07: U$1.P$P23
P1.09: U$1.P$R1
P1.10: U$1.P$A20
P1.11: U$1.P$B19
P1.12: U$1.P$B17
P1.13: U$1.P$A16
P1.14: U$1.P$B15
P1.15: U$1.P$A14
PMIC_INT: IC1.A1 U$1.P$T2
PREVGH: D5.1 EPD_C9.2 J1.21
PREVGL: D4.2 EPD_C11.2 J1.23
RESE: J1.3 Q3.2 R1_EP_DR.2
RESET: J2.6 TP_RESET.TP U$1.P$AC13
RF: ANT1.1 C4.2 C22.2 L1.2
SCK: J1.13 U$1.P$A12
SCL: IC1.B1 IC2.C1 IC3.12 R1.1 R17.2 TP_SCL.TP U1.7 U$1.P$M2
SDA: IC1.C1 IC2.B2 IC3.2 R2.1 R18.2 TP_SDA.TP U1.8 U$1.P$L1
SWDCLK: J2.4 TP_SWDCLK.TP U$1.P$AA24
SWDIO: J2.2 TP_SWDIO.TP U$1.P$AC24
SWO: TP_SWO.TP U$1.P$AD22
VBAT: C27.1 C37.2 IC1.C2 TP_VBAT.TP U1.2 U1.3
VBUS: C21.1 C38.2 C42.1 C43.1 D3.5 IC1.A2 J4.A4_B9 J4.A9_B4 U$1.P$AD2
VREG: C23.1 C24.2 C39.1 IC1.B2 IC9.A1 IC9.A2 IC9.A3 TP_VREG.TP

## Tracks (layer width: path | path; a pad name or v marks a point on that pad's centre or on a via)
3V3  (via drill 0.35)
  Top 0.156: IC9.E3 IC9.E2 | IC9.E3 31.49,4.88 | IC9.E3 30.39,4.83 | U$1.P$Y2 26.89,12.84 U$1.P$W1 26.11,12.31 v25.99,12.31 | IC2.C2 17.49,19.74 v17.49,18.93 | 30.03,4.29 29.98,4.24 v29.81,4.24
  Top 0.165: U$1.P$AD14 31.02,10.46 v31.02,10.42
  Top 0.3: 32.64,10.38 C8.2 35.81,9.28 TP_3.3V.TP 38.6,6.48 40.88,6.48 J2.1 | 32.64,10.38 U$1.P$AD23 | C7.2 31.56,8.28 31.56,8.83 | v33.59,18.81 33.34,18.55 C12.2 32.14,18.25 U$1.P$A22 | TP_3V3.TP 40.83,19.07 v41.4,19.07 | C14.1 25.38,19.58 v26.11,19.58 26.09,19.56 26.09,17.97 | IC3.7 23.85,8.82 23.85,9.49 23.51,9.49 23.49,9.52 v23.19,9.52 22.94,9.77 22.94,10.46 22.87,10.53 22.87,10.96 21.82,10.96 v21.44,10.58 22.23,10.58 C34.2 | Q1.2 16.43,17.99 v17.23,17.19 17.11,17.07 R1_PWR_EPD.2 | C19.2 17.65,15.04 v17.65,14.35 | IC3.3 23.36,7.19 23.36,6.66 24.17,5.85 24.24,5.85 v24.32,5.77 | U$1.P$B1 26.09,17.89 26.09,17.97 | R7.2 31.76,3.86 31.58,3.86 31.4,4.04 31.4,4.54 31.55,4.68 31.55,4.94 31.49,4.88 31.43,4.82 31.23,4.82 v31.07,4.97 | C6.1 26.31,10.41 26.53,10.62 v26.69,10.62 | R8.2 20.51,4.11 20.18,3.77 v19.62,3.77 | 31.56,8.83 31.56,9.94 31.51,9.99 | 31.56,8.83 v31.92,9.19 | 32.64,10.38 32.61,10.38 32.21,9.99 31.51,9.99 | 31.51,9.99 31.3,9.99 31.02,10.27 v31.02,10.42 | v9.13,4.28 9.53,4.68 R5.2 | v28.05,3.94 27.77,3.66 C25.2 26.95,4.55 C33.1 | v19.79,5.01 19.88,4.92 20.15,4.92 R17.1 20.85,5.34 20.94,5.24 21.38,5.24 21.45,5.31 v21.49,5.31 | 30.03,4.29 30.03,4.47 30.39,4.83 | R18.1 21.57,6.9 v21.66,6.81 v21.67,6.81 | v21.58,9.19 21.91,9.19 IC3.10 22.38,8.86 | 26.09,17.97 v26.23,17.83
  Route15 0.3: v33.59,18.81 34.22,18.81 | 26.65,12.03 26.74,11.94 26.74,10.99 26.4,10.66 26.4,10.65 | 26.65,12.03 26.51,12.17 27.26,12.17 28.32,11.12 30,11.12 30.7,10.42 v31.02,10.42 | v17.49,18.93 17.17,18.61 17.17,17.25 v17.23,17.19 18.13,17.19 17.95,17.01 17.9,17.01 17.49,16.6 17.49,14.51 v17.65,14.35 17.65,13.59 17.41,13.35 17.41,12.07 17.39,12.05 17.39,11.49 18.05,10.82 20.65,10.82 20.9,10.58 v21.44,10.58 21.44,9.3 21.58,9.16 | v26.11,19.58 28.96,19.58 29.06,19.48 33.55,19.48 34.22,18.81 | 25.98,12.43 26.13,12.43 26.54,12.03 26.65,12.03 | 26.4,10.65 26.44,10.61 26.45,10.62 v26.69,10.62 | 19.72,5.13 19.76,5.09 | 19.76,5.09 19.96,4.89 | 21.58,9.16 21.31,8.89 21.31,7.16 v21.66,6.81 v21.67,6.81 | 21.58,9.16 v21.58,9.19 | 19.72,5.13 19.12,5.73 17.89,5.73 17.14,6.48 14.43,6.48 13.81,5.87 10.54,5.87 9.04,4.37 v9.13,4.28 | v28.05,3.94 28.26,3.94 28.56,4.24 v29.81,4.24 | 19.72,5.13 19.72,3.87 v19.62,3.77 | 19.76,5.09 19.76,5.04 v19.79,5.01 | 34.22,18.81 41.14,18.81 v41.4,19.07 | 25.83,17.38 23.97,15.53 23.97,13.37 24.91,12.43 25.98,12.43 | 25.83,17.38 25.99,17.54 | 25.98,12.43 25.98,12.34 25.99,12.33 v25.99,12.31 | v31.07,4.97 30.95,5.1 30.95,8.22 v31.92,9.19 | 26.4,10.65 25.64,9.89 24.76,9.89 24.43,9.56 23.24,9.56 v23.19,9.52 | 24.46,5.62 24.24,5.85 23.77,5.85 22.82,6.81 22.4,6.81 | v21.49,5.31 21.49,5.43 22.4,6.34 22.4,6.81 | 21.93,6.81 v21.67,6.81 | v21.67,6.81 22.4,6.81 | 25.83,17.38 25.83,17.43 v26.23,17.83
ALERT  (via drill 0.35)
  Top 0.156: U1.5 14.56,14.45 v14.66,14.55 | U$1.P$J24 33.8,14.68 34.61,14.68 34.76,14.53 35,14.53 35.16,14.37 35.98,14.37 v36.08,14.47
  Bottom 0.156: v14.66,14.55 14.66,19.8 17.04,22.18 19.03,22.18 22.32,18.89 32.1,18.89 33.5,20.29 33.5,20.73 31.6,22.63 33.46,24.49 39.99,24.49 42.01,22.47 42.01,17.91 38.57,14.47 v36.08,14.47
D+  (via drill 0.35)
  Top 0.152: D3.4 22.72,24.59 v22.89,24.76 | U$1.P$AD6 27.6,10.8 27.6,9.82 27.5,9.72 v27.5,9.68
  Bottom 0.152: v22.89,24.76 23.92,25.79 42.26,25.79 43.62,24.43 43.62,15.75 40.96,13.09 36.45,13.09 35.44,12.08 35.44,6.89 34.75,6.2 32.88,6.2 30.32,8.76 28.95,8.76 28.03,9.68 v27.5,9.68
D-  (via drill 0.35)
  Top 0.152: v16.27,2.65 15.88,2.65 14.51,4.03 14.51,4.53 13.87,5.16 13.87,5.82 14.63,6.58 16.35,6.58 16.51,6.74 18.46,6.74 v18.69,6.97 | U$1.P$AD4 27.52,11.22 27.52,11.18 27.3,10.96 27.3,10.3 26.96,9.96 26.56,9.96 26.56,9.63 v27.04,9.14 | v18.15,16.38 18.34,16.38 20.98,19.02 20.98,20 20.35,20.63 20.72,21 22.84,21 22.98,20.86 24.84,20.86 28.68,24.7 28.68,31.48 28.27,31.89 16.56,31.89 v16.15,31.48 | D3.6 18.22,24.59 18,24.81 16.79,24.81 v16.21,25.39
  Bottom 0.152: v16.27,2.65 16.96,2.65 17.41,3.11 19.82,3.11 20.28,3.57 26.73,3.57 30.04,6.88 30.04,7.27 28.13,9.18 27.08,9.18 v27.04,9.14 | v18.15,16.38 18.15,16.14 15.85,13.84 15.85,9.81 v18.69,6.97 | v16.15,31.48 16.15,25.45 v16.21,25.39
DN  (via drill 0.35)
  Top 0.156: 23.5,29.78 23.63,29.65 23.63,29.09 J4.B7 | 23.5,29.78 23,29.78 22.87,29.65 22.87,29.09 J4.A7 | D3.1 20.54,21.67 20.54,21.43 20.68,21.29 24.18,21.29 24.62,21.73 24.62,27.5 v24.75,27.63 | v24.15,30.41 23.52,29.78 23.5,29.78
  Bottom 0.156: v24.75,27.63 24.75,29.15 24.45,29.45 24.45,30.11 v24.15,30.41
DP
  Top 0.156: J4.A6 23.13,28.86 23.13,28.3 23,28.17 22.5,28.17 22.37,28.3 22.37,28.86 J4.B6 22.25,26.26 23.5,25.01 23.5,24.51 22.02,23.03 D3.3
EPD_3V3  (via drill 0.35)
  Top 0.3: J1.15 J1.16 11.49,15.75 EPD_C5.2 11.88,16.5 Q1.3 13.32,17.04 v13.43,16.93 | C1-EP-DR.1 v13.43,18.88 v13.44,18.89 | v13.21,20.44 13.25,20.48 L5.1
  Route15 0.3: v13.43,16.93 13.52,17.02 13.52,18.97 | 13.52,18.97 v13.44,18.89 | 13.52,18.97 13.52,19.14 13.37,19.29 13.37,20.28 v13.21,20.44
EPD_BUSY  (via drill 0.35)
  Top 0.156: J1.9 10.51,19.13 10.18,19.13 8.17,17.12 8.17,12.71 v9.12,11.77 | U$1.P$AD12 29.67,11.31 v29.67,9.34
  Bottom 0.156: v9.12,11.77 9.29,11.59 10.5,11.59 10.93,11.16 11.53,11.16 11.89,10.81 11.89,8.61 11.28,8 11.28,6.83 11.93,6.18 14.73,6.18 16.34,4.57 17.37,4.57 18.53,5.73 19.18,5.73 19.38,5.93 19.93,5.93 21.41,7.41 21.55,7.41 22.91,8.76 26.06,8.76 26.25,8.95 26.25,9.48 27.46,10.69 28.64,10.69 29.14,10.19 29.14,9.39 29.19,9.34 v29.67,9.34
EPD_CS  (via drill 0.35)
  Top 0.152: J1.12 10.5,17.63 10.18,17.63 9.4,16.85 v9.4,15.93 | U$1.P$K2 26.24,15.09 v25.9,15.43 | v13.75,14.85 14.08,14.85 14.38,15.15 16.19,15.15 16.71,15.67 16.86,15.67 17.11,15.93 17.8,15.93 17.83,15.9 18.32,15.9 19.21,16.8 19.98,16.8 20.08,16.91 20.08,17.44 21.63,18.98 22.02,18.98 22.57,18.44 v22.68,18.44
  Bottom 0.152: v9.4,15.93 9.4,15.11 9.53,14.98 13.62,14.98 v13.75,14.85 | v25.9,15.43 24.57,16.75 24.57,17.2 23.33,18.44 v22.68,18.44
EPD_DC  (via drill 0.35)
  Top 0.152: U$1.P$AD10 29.14,10.03 27.77,8.66 27.77,8.06
  Top 0.156: J1.11 10.51,18.13 10.18,18.13 8.79,16.74 8.79,15.68 9.27,15.2 9.27,13.8 v9.31,13.77 | 27.77,8.06 27.1,8.06 26.86,8.3 26.86,8.48 26.74,8.6 26.74,8.72 26.35,9.11 25.75,9.11 v25.64,9.22
  Bottom 0.156: v9.31,13.77 11.6,11.47 11.66,11.47 12.92,10.21 12.96,10.21 13.79,9.38 13.79,7.57 16.48,4.88 17.24,4.88 18.4,6.04 19.05,6.04 19.25,6.24 19.7,6.24 22.02,8.55 22.02,8.77 22.31,9.06 23.59,9.06 23.72,9.19 25.6,9.19 v25.64,9.22
EPD_RST  (via drill 0.35)
  Top 0.156: J1.10 10.51,18.63 10.18,18.63 8.48,16.93 8.48,15.55 8.66,15.37 8.66,13.42 8.78,13.3 v8.78,13.01 | U$1.P$AC11 29.39,10.68 29.36,10.65 29.36,9.81 28.35,8.8 28.35,8.37 v28.32,8.35
  Bottom 0.156: v8.78,13.01 8.48,12.71 8.48,4.07 8.87,3.68 9.38,3.68 9.97,4.27 17.5,4.27 18.66,5.42 19.31,5.42 19.51,5.62 20.49,5.62 22.26,3.85 26.61,3.85 28.92,6.15 28.92,7.75 v28.32,8.35
GDR
  Top 0.156: J1.2 10.74,22.87 11.07,22.87 11.26,23.06 R2_EP_DR.2 11.06,23.8 10.3,24.55 10.3,25 10.52,25.21 Q3.1
GND  (via drill 0.35)
  Top 0.152: J2.3 42.5,6.78 J2.5 | U$1.P$F23 32.34,16.09 31.99,16.09 U$1.P$78
  Top 0.156: C11.1 34.41,16.78 C1.1 34.04,17.07 | X1.4 38.02,16.25 38.06,16.25 38.7,15.62 X1.2 | EPD_C8.1 12.93,10.95 EPD_C9.1 | EPD_C2.1 12.43,21.18 EPD_C1.1 | EPD_C6.1 12.72,12.7 EPD_C7.1 | U1.9 15.3,13.31 U1.6 14.26,13.31 v13.62,13.95 | U$1.P$75 28.39,16.69 U$1.P$B7 28.39,17.66 28.34,17.71 28.34,17.97 28.51,18.14 28.75,18.14 29.3,18.7 29.3,19.35 | 30.45,22.84 30.59,22.98 | 29.04,22.71 29.16,22.84 | SW_DN.1 38.68,3.97 39.28,3.37 40.53,3.37 41.41,4.25 41.41,5.68 42.5,6.78 | 18.68,15.14 | 18.68,15.14 18.2,15.62 17.71,15.62 17.68,15.65 17.23,15.65 17.11,15.53 17.11,15.39 C19.1 | C37.1 18.86,14.96 18.68,15.14 | SW_ENT.1 23.9,4.32 23.9,4.61 23.64,4.87 C31.1 | IC9.B1 IC9.C2 IC9.C3 30.53,5.77 31.86,5.77 32.23,6.14 32.23,7.3 32.57,7.64 | 32.57,7.64 34.62,7.64 35.16,7.1 35.16,6.66 34.8,6.3 | R1_USB.1 23.77,27.55 23.77,27.51 v23.77,26.43 | J4.A12_B1 19.8,29.47 19.48,29.79 19.48,30.31 19.89,30.72 v19.89,31.44 | U$1.P$80 U$1.P$74 | 34.04,17.07 33.33,17.07 33.2,16.95 32.57,16.95 32.34,16.72 32.34,16.46 32.34,16.09 | C32.1 15.34,22.43 15.34,22.39 15.71,22.01 15.71,19.79 15.94,19.56 16.09,19.56 | 16.09,19.56 16.32,19.56 | IC2.B1 16.83,20.3 | 16.83,20.3 16.09,19.56 | 19.62,22.77 19.73,22.89 20.5,22.89 20.62,22.77 20.62,22.54 D3.2 | 19.62,22.77 19.62,22.46 | 19.62,22.77 18.81,21.97 | 18.81,21.97 18.55,21.71 | 18.81,21.97 18.81,21.27 IC2.B3 17.83,20.3 16.83,20.3 | 32.57,7.64 32.35,7.86 30.03,7.86 29.9,7.99 29.9,8.12 C7.1 | 30.38,21.09 30.41,21.06 | 31.65,19.07 C12.1 | C9.1 35.92,13.68 36.97,14.72 36.97,14.97 36.54,15.4 36.54,17.24 36.34,17.44 34.62,17.44 34.42,17.24 34.2,17.24 34.04,17.07 | C6.2 25.48,9.75 25.05,9.32 25.05,8.21 25.01,8.17 v25.01,7.3
  Top 0.156: C21.2 26.04,8.27 26.04,7.83 26.65,7.22 27.03,7.22 27.43,7.62 C20.2 | C25.1 26.45,4.06 26.34,4.17 26.34,4.44 C33.2 | C23.2 26.92,5.96 C24.1 25.88,5.86 v25.6,6.13 | U1.1 16.14,11.92 15.32,11.92 15.32,11.44 14.98,11.11 14.98,10.11 15.32,9.78 15.32,9.36 15.47,9.21 16.23,9.21 16.23,8.07 16.7,7.6 17.49,8.39 C39.2
  Top 0.3: C13.2 31.65,19.07
  Bottom 0.156: v23.77,26.43 26.72,26.43 30.11,29.82 | 30.11,29.82 30.21,29.92 | 30.11,29.82 28.49,31.44 v19.89,31.44 | v23.27,8.23 24.2,7.3 v25.01,7.3
  other vias: 21.68,26.92 10.76,24.74 11.8,5.21 10.64,8.7 7.62,9.26 8.98,9.12 25.13,4.93
  pour Route2: -5.45,2.45 -0.98,-2.02 1.01,-2.02 1.03,-2.04 1.22,-2.22 51.17,-2.22 51.17,27.09 41.28,36.98 -5.46,36.98 -5.45,36.98
  pour Bottom: -0.54,-1.73 49.72,-1.73 49.72,28.85 40.95,37.62 -3.15,37.62 -3.15,0.88
  pour Top: 1.12,-2.58 51.29,-2.58 51.29,28.82 41.79,38.32 -1.55,38.32 -1.55,0.09
HAPTIC_EN  (via drill 0.35)
  Top 0.156: IC2.A1 16.74,20.71 16.73,20.71 16.53,20.5 v16.17,20.5 | U$1.P$U1 26.13,12.83 24.79,12.83 24.68,12.72 24.68,12.28 24.52,12.28 23.82,11.58 v23.82,11.51
  Bottom 0.156: v16.17,20.5 16.17,19.39 17.66,17.9 19.09,17.9 20.44,16.55 23.36,16.55 23.93,15.98 23.93,11.68 23.82,11.57 v23.82,11.51
IMU_INT1  (via drill 0.35, 0.35 pad 0.01)
  Top 0.156: IC3.5 23.95,7.88 24.07,7.88 24.44,8.25 24.44,8.4 24.49,8.45 24.49,9.56 24.73,9.8 24.73,10.51 24.37,10.87 23.87,10.87 v23.54,10.54 | U$1.P$N1 26.58,14.4 25.92,14.4 25.82,14.3 23.92,14.3 23.48,14.74 v23.16,14.74
  Bottom 0.156: v23.54,10.54 23.54,10.74 22.9,11.38 22.9,14.48 v23.16,14.74
IMU_INT2  (via drill 0.35 pad 0.01)
  Top 0.156: IC3.6 23.95,8.38 24.02,8.38 24.2,8.56 24.2,10.13 24.16,10.18 v24.16,10.22 | U$1.P$P2 26.17,14.09 26.02,13.94 25.33,13.94 v24.85,13.46
  Bottom 0.156: v24.85,13.46 24.85,13.39 25.17,13.07 25.17,11.63 24.16,10.62 v24.16,10.22
LX1  (via drill 0.35)
  Top 0.156: 30.4,6.08 IC9.B3 | 30.4,6.08 IC9.B2 | L7.1 30.72,3.01 v30.72,4.07 | 30.4,6.08 30.45,6.12 31.53,6.12 v31.72,6.32
  Bottom 0.156: v30.72,4.07 31.54,4.07 31.72,4.25 v31.72,6.32
LX2  (via drill 0.35)
  Top 0.156: IC9.D2 IC9.D3 30.5,5.34 30.58,5.34 30.67,5.43 32.16,5.43 v32.29,5.3 | L7.2 27.86,2.18 28.78,2.18 v28.78,1.47
  Bottom 0.156: v28.78,1.47 29.62,1.47 30.72,2.58 31.12,2.97 31.12,2.98 31.39,3.25 31.52,3.38 31.6,3.38 33.34,5.12 32.55,5.12 32.38,5.3 v32.29,5.3
MOSI  (via drill 0.35)
  Top 0.156: J1.14 10.74,16.87 11.07,16.87 11.82,17.62 11.82,19.19 12.19,19.56 12.19,19.64 13.98,19.64 v14.05,19.57 | U$1.P$B13 29.89,20.8 29.94,20.74 v29.94,20.63
  Bottom 0.156: v14.05,19.57 14.35,19.87 14.35,19.93 15.57,21.15 15.57,22.53 15.99,22.95 18.66,22.95 22.05,19.56 24.78,19.56 25.85,20.63 v29.94,20.63
N$1
  Top 0.156: R9.2 21.6,13.66 20.63,13.66 20.45,13.48 IC1.D1
N$2
  Top 0.156: R1.2 29.46,5.38 29.5,5.34 29.58,5.34 IC9.D1
N$3
  Top 0.156: R2.2 IC9.E1
N$4
  Top 0.156: R3.2 21.96,7.44 22.01,7.38 22.17,7.38 IC3.1
N$5
  Top 0.156: U$1.P$AC5 27.36,11.84 27.24,11.72 26.26,11.72 26.24,11.7 25.55,11.7 25.03,11.19 25.03,9.71 24.77,9.44 24.77,8.33 24.73,8.29 24.73,7.99 24.31,7.57 24.31,7.1 24.97,6.44 25.24,6.44 25.77,6.97 25.77,7.07 26.4,7.07 26.54,6.93 27.15,6.93 27.32,7.11 C20.1
N$6  (via drill 0.35)
  Top 0.156: Q3.3 14.67,24.3 14.67,21.52 14.78,21.41 15.27,21.41 L5.2 15.26,18.87 v15.42,18.71 | C2-EP-DR.2 18.11,7.99 17.49,7.99 16.82,7.32 16.58,7.32 16.34,7.56 D5.2 15.04,7.61 15.04,8.02 v15.77,8.75
  Bottom 0.156: v15.42,18.71 15.42,17.67 15.88,17.21 15.88,14.47 15.54,14.13 15.54,9.15 15.77,8.92 v15.77,8.75
N$7
  Top 0.156: C9.2 34.49,14.4 34.12,14.4 34.06,14.34 U$1.P$N24
N$8  (via drill 0.35)
  Top 0.156: L1.1 36.57,22.89 C3.2 35.3,21.86 v35.24,21.79 | U$1.P$H23 32.92,15.59 33,15.67 33.37,15.67 33.92,15.12 34.56,15.12 34.87,14.81 35.7,14.81 36.04,15.16 v36.04,16.98
  Bottom 0.156: v35.24,21.79 36.04,20.99 v36.04,16.98
N$9
  Top 0.156: U$1.P$D23 32.92,16.59 33,16.67 33.28,16.67 33.54,16.41 C11.2
N$10
  Top 0.156: L2.1 28.53,21.56 27.39,20.42 U$1.P$B3
N$11
  Top 0.156: X1.3 38.95,17.38 38.71,17.62 38.71,17.79 C2.2 36.65,17.93 36.57,18.01 32.81,18.01 U$1.P$A23
N$12
  Top 0.156: U$1.P$B24 33.38,17.59 C1.2 34.26,17.72 36.46,17.72 36.82,17.36 36.82,16.27 36.97,16.12 37.01,16.12 X1.1
N$13
  Top 0.156: C13.1 31.62,18.32 U$1.P$A18
N$14  (via drill 0.35)
  Top 0.156: U$1.P$E24 33.91,15.57 C10.2 34.89,15.19 34.99,15.1 35.58,15.1 35.75,15.27 35.75,16.51 35.28,16.98 v35.04,16.98 | L3.1 30.88,22.43 v32.7,22.43 | U$1.P$B5 27.89,18.07 C15.2 | 28.73,18.77 C15.2 | C15.2 28.55,18.72 27.74,18.72 27.74,19.65 29.46,21.37 29.82,21.37 L3.1 | L3.1 30.98,20.16 C16.2
  Bottom 0.156: v32.7,22.43 35.14,19.98 35.14,18.83 35.04,18.72 v35.04,16.98
N$15
  Top 0.156: L2.2 30.92,23.47 L3.2
N$16
  Top 0.152: U$1.P$C1 26.64,16.88
  Top 0.156: 26.64,16.88 26.54,16.88 25.31,18.1 25.31,18.88 25.19,19 25.05,19 C5.2
N$17
  Top 0.156: U$1.P$D2 26.86,16.59 26.78,16.51 24.91,16.51 24.87,16.55 24.87,16.61 | 25.12,16.96 C17.1 25.22,16.96 24.87,16.61 | X2.2 22.96,19.1 23.34,19.1 23.35,17.09 23.64,16.79 23.64,16.55 23.91,16.28 24.54,16.28 24.87,16.61
N$18  (via drill 0.35)
  Top 0.156: U$1.P$F2 26.86,16.09 26.78,16.17 25.99,16.17 25.18,15.36 24.25,15.36 24.1,15.51 24.1,15.69 22.98,16.82 22.75,16.82 X2.1 22.18,18.18 v21.95,18.41 | C18.1 24.15,16.79 v24.1,16.74
  Bottom 0.156: v24.1,16.74 23.62,16.74 v21.95,18.41
N$19
  Top 0.156: D2.2 6.69,6.71 D4.1 7.26,7.62 9.39,5.49 9.88,5.49 11.16,6.77 13.35,6.77 13.47,6.89 16.22,6.89 16.36,7.02 17.65,7.02 C2-EP-DR.1
N$20
  Top 0.156: SJ1.2 12.58,27.31 R1_EP_DR.1 R_TYPE_SEL.2
N$21
  Top 0.156: EPD_C2.2 10.69,21.68 J1.4
N$22
  Top 0.156: J1.18 10.98,14.75 EPD_C6.2
N$23
  Top 0.156: EPD_C1.2 10.69,21.19 J1.5
N$24
  Top 0.156: EPD_C7.2 11.82,13.05 11.82,13.38 10.95,14.25 J1.19
N$25
  Top 0.156: J1.20 10.95,13.75 11.51,13.19 11.51,13.13 11.51,13.12 11.51,12.49 EPD_C8.2
N$26
  Top 0.156: R1_USB.2 24.09,28.27 24.13,28.3 24.13,28.86 J4.A5
N$27  (via drill 0.35)
  Top 0.156: J1.22 10.51,12.63 10.18,12.63 9.74,12.19 9.74,11.52 9.36,11.15 9.14,11.15 7.71,9.72 7.43,9.72 7.16,9.45 7.16,9.07 8.03,8.2 9.17,8.2 v9.26,8.11 | v11.28,10.56 10.94,10.22 EPD_C10.2
  Bottom 0.156: v9.26,8.11 9.09,8.28 9.09,8.37 v11.28,10.56
N$28
  Top 0.152: R2_USB.1 J4.B5
N$29
  Top 0.156: J1.24 10.62,11.56 10.67,11.51 10.67,10.73 10.31,10.38 9.81,10.38 9.56,10.63 9.05,10.63 8.67,10.24 8.67,9.9 EPD_C12.2
N$30
  Top 0.156: C32.2 17.38,20.93 IC2.A2
N$31  (via drill 0.35)
  other vias: 34.31,33.93
N$32  (via drill 0.35)
  other vias: 34.27,32.82
N$33  (via drill 0.35)
  other vias: 34.33,31.82
N$34  (via drill 0.35)
  other vias: 34.3,30.47
N$35  (via drill 0.35)
  other vias: 34.22,29.39
N$36  (via drill 0.35)
  other vias: 34.33,28.15
N$37  (via drill 0.35)
  other vias: 34.48,26.88
N$38  (via drill 0.35)
  other vias: 35.6,26.47
N$39  (via drill 0.35)
  other vias: 36.67,26.32
N$40  (via drill 0.35)
  other vias: 37.74,26.28
N$41  (via drill 0.35)
  other vias: 38.82,26.28
N$42  (via drill 0.35)
  other vias: 39.94,26.24
N$43  (via drill 0.35)
  other vias: 40.99,26.24
N$44  (via drill 0.35)
  other vias: 42,26.24
N$45  (via drill 0.35)
  other vias: 43.12,26.24
N$46  (via drill 0.35)
  other vias: 44.09,26.25
N$47  (via drill 0.35)
  other vias: 45.04,26.22
OUT+
  Top 0.156: IC2.A3 17.74,20.99 17.74,21.02 17.5,21.25 TP_OP.TP
OUT-
  Top 0.156: TP_ON.TP 18.24,19.49 IC2.C3
P0.13  (via drill 0.35)
  Top 0.156: R5.1 10.13,5 C30.2 | C30.2 10.6,4.88 SW_UP.2 | U$1.P$AD8 28.03,10.73 28.02,10.73 27.92,10.63 27.92,9.93 27.97,9.88 27.97,9.43 27.32,8.77 v27.32,8.52 | C30.2 10.94,5.22 10.94,5.26 11.51,5.83 12.77,5.83 13.99,4.61 13.99,4.07 16.01,2.05 16.52,2.05 16.87,2.4 16.87,3.35 17.6,4.07 19.07,4.07 19.37,4.38 20.25,4.38 20.72,4.86 21.78,4.86 21.95,5.02 21.95,5.79 22.37,6.21 22.88,6.21 23.55,5.54 23.55,5.49 24.46,4.58 24.84,4.58 24.94,4.48 25.09,4.48 v25.27,4.3
  Bottom 0.156: v27.32,8.52 27.04,8.52 26.38,7.86 26.38,6.87 26.59,6.67 26.59,5.74 25.27,4.41 v25.27,4.3
P0.14  (via drill 0.35)
  Top 0.156: R8.1 20.88,3.75 20.96,3.75 21.03,3.82 SW_ENT.2 21.6,4.14 22.21,4.75 22.57,4.75 C31.2 22.7,5.2 v22.4,5.49 | U$1.P$AC9 28.89,10.51 28.5,10.12 28.5,10.18 v28.47,10.22
  Bottom 0.156: v22.4,5.49 23.73,5.49 24.21,5.02 24.94,5.74 25.1,5.74 25.1,6.63 26.07,7.61 26.07,8.37 26.59,8.88 26.59,9.41 27.39,10.22 v28.47,10.22
P1.01  (via drill 0.35)
  Top 0.156: Q1.1 15.73,16.09 R1_PWR_EPD.1 15.71,16.52 v15.27,16.96 | v16.86,5.8 17.86,5.8 v18.88,4.79 | U$1.P$Y23 34.06,12.59 34.25,12.4 36.12,12.4 v36.26,12.25
  Bottom 0.156: v16.86,5.8 16.86,6.97 14.91,8.92 15.23,9.24 15.23,14.25 15.27,14.29 v15.27,16.96 | v18.88,4.79 18.88,3.59 18.7,3.41 16.16,3.41 15.48,2.73 15.48,2.37 15.57,2.29 15.57,2.05 15.87,1.75 17.08,1.75 17.2,1.87 18.55,1.87 18.77,2.09 19.23,2.09 20.38,3.23 29.07,3.23 29.2,3.36 29.2,4.49 31.48,6.77 31.91,6.77 33.23,5.45 35.98,5.45 36.84,6.31 36.84,11.67 v36.26,12.25
P1.02  (via drill 0.35)
  Top 0.156: SW_DN.2 32.29,4.29 R7.1 32.29,4.69 32.55,4.69 32.92,5.06 32.92,5.58 32.63,5.86 C29.2 32.63,6.4 33.16,6.92 34.17,6.92 v34.37,7.12 | U$1.P$W24 33.65,13.35 34.15,13.35 v34.5,13
  Bottom 0.156: v34.37,7.12 34.5,7.25 v34.5,13
PMIC_INT  (via drill 0.35)
  Top 0.156: v25.86,13.45 26,13.59 U$1.P$T2 | IC1.A1 20.59,11.95 21.17,11.95 v21.61,11.51
  Bottom 0.156: v25.86,13.45 25.86,13.64 25.15,14.35 25.15,14.66 24.24,14.66 24.24,13.21 24.86,12.59 24.86,11.84 24.07,11.05 23.63,11.05 23.19,11.49 23.19,11.52 23.62,11.96 23.62,15.04 23.47,15.19 22.56,15.19 22.3,14.93 22.3,14.43 22.59,14.14 22.59,13.04 21.61,12.06 v21.61,11.51
PREVGH  (via drill 0.35)
  Top 0.156: J1.21 10.95,13.25 11.21,13 11.21,11.66 EPD_C9.2 12.16,10.14 v12.71,9.6 | v13.1,7.38 11.67,7.38 D5.1
  Bottom 0.156: v12.71,9.6 12.71,7.77 v13.1,7.38
PREVGL  (via drill 0.35)
  Top 0.156: J1.23 10.51,12.13 10.18,12.13 10.04,12 10.04,11.19 10.06,11.17 v10.06,10.99 | D4.2 2.89,8.22 7.05,8.22 7.63,7.65 9.45,7.65 9.72,7.92 9.72,8.34 9.44,8.62 9.44,9.89 v9.31,10.02 9.55,10.02 EPD_C11.2 9.85,9.59
  Bottom 0.156: v10.06,10.99 10.06,10.77 v9.31,10.02
RESE
  Top 0.156: J1.3 12.23,22.25 12.49,22.51 12.49,23.73 Q3.2 12.31,24.11 13.07,24.86 13.07,25.93 R1_EP_DR.2
RESET  (via drill 0.35)
  Top 0.156: v30.32,9.84 30.32,10.43 29.89,10.86 U$1.P$AC13 | J2.6 43.72,8.51 44.81,9.6 44.81,11.02 43.91,11.92 TP_RESET.TP 43.96,13.14 43.96,12.36 42.13,12.36 41.96,12.53 41.96,14.73 37.52,14.73 35.86,13.06 v35.79,13.06
  Bottom 0.156: v30.32,9.84 30.44,9.72 30.53,9.72 33.33,6.92 33.71,6.92 34.12,6.51 34.62,6.51 35.13,7.02 35.13,12.41 v35.79,13.06
RF
  Top 0.156: C22.2 38.14,22.16 C4.2 37.9,23.08 L1.2 38.2,23.52 38.2,26.47 38.08,26.59 ANT1.1
SCK  (via drill 0.35)
  Top 0.156: J1.13 10.74,17.37 11.07,17.37 11.52,17.81 11.52,19.32 11.88,19.68 11.88,20.26 11.9,20.28 v12.07,20.28 | U$1.P$A12 29.34,18.14 29.59,18.38 29.59,19.92 v29.34,20.16
  Bottom 0.156: v12.07,20.28 15.63,23.84 27.81,23.84 30.4,21.25 30.4,20.45 30.13,20.18 29.36,20.18 v29.34,20.16
SCL  (via drill 0.35)
  Top 0.156: IC2.C1 16.88,18.47 17.84,17.51 17.84,17.15 16.67,15.98 16.58,15.98 16.06,15.46 13.5,15.46 13.14,15.1 13.14,13.78 13.96,12.97 14.4,12.97 U1.7 14.43,12.68 14.11,12.68 13.32,11.88 13.32,9.35 12.19,8.21 10.88,8.21 9.64,6.97 v9.64,6.1 | 27.12,14.57 U$1.P$M2 24.16,14.58 23.62,15.11 23.62,15.19 23.14,15.67 v23.08,15.67 | v22.84,7.79 22.84,7.76 IC3.12 22.17,7.76 21.05,8.88 19.58,8.88 v19.21,8.51 | v14.48,5.57 15.52,4.54 TP_SCL.TP 16.25,5.05 16.25,6.05 16.61,6.41 18.09,6.41 18.63,5.87 19.5,5.87 19.52,5.88 R17.2 v21.11,5.88 v21.12,5.89 | IC1.B1 20.83,12.68 v21.09,12.42 v21.1,12.41 | v24.36,6.4 24.61,6.4 25.34,5.67 25.66,5.67 26.04,5.29 27.83,5.29 27.93,5.38 R1.1
  Bottom 0.156: v22.84,7.79 24.23,6.4 v24.36,6.4 22.67,6.4 22.16,5.89 v21.12,5.89 | v14.48,5.57 12.11,5.57 11.59,6.1 v9.64,6.1 | v19.21,8.51 19.21,9.69 20.26,10.74 20.26,11.6 v21.09,12.42 21.39,12.73 21.39,14.5 22.79,15.9 22.85,15.9 v23.08,15.67
SDA  (via drill 0.35)
  Top 0.156: U1.8 14.56,10.34 14.4,10.18 v14.4,9.6 | U$1.P$L1 25.13,14.84 24.91,15.06 24.15,15.06 23.78,15.43 23.78,15.61 23.24,16.15 22.55,16.15 | v19.92,7.31 19.92,6.91 20.48,6.35 R18.2 21.76,6.35 21.92,6.19 22.69,6.96 22.69,7.12 IC3.2 22.93,7.12 22.93,6.59 23.86,5.66 23.86,5.59 24.13,5.31 24.84,5.31 24.92,5.39 25.54,5.39 25.93,5 27.21,5 27.32,4.88 R2.1 | IC1.C1 20.48,13.08 20.69,13.29 21.19,13.29 21.51,12.96 21.91,12.96 22.46,12.41 22.69,12.41 | 22.97,13.17 TP_SDA.TP | 22.69,12.41 22.69,12.81 23.01,13.13 22.97,13.17 | 22.55,16.15 22.3,15.9 21.6,16.6 21.14,16.6 21,16.73 21,16.85 v20.69,17.16 | IC2.B2 17.66,20.07 18.63,20.07 18.83,20.28 18.83,20.87 v19.27,21.3 | 22.69,12.41 22.69,12 v22.37,11.68 | 22.97,13.17 22.55,13.59 22.55,16.15
  Bottom 0.156: v14.4,9.6 14.4,7.4 16.61,5.19 17.11,5.19 18.27,6.35 18.93,6.35 19.12,6.54 19.15,6.54 v19.92,7.31 19.92,9.71 21.27,11.06 21.8,11.06 22.07,11.32 22.07,11.38 v22.37,11.68 | v20.69,17.16 19.27,18.58 v19.27,21.3
SWDCLK
  Top 0.156: U$1.P$AA24 33.25,12.23 33.98,12.23 34.46,11.75 36.41,11.75 36.77,12.11 36.77,13.13 38.05,14.42 39.39,14.42 TP_SWDCLK.TP 40.61,11.88 41.42,11.07 41.42,9.07 J2.4
SWDIO
  Top 0.156: U$1.P$AC24 33.93,11.84 34.33,11.44 36.96,11.44 38.15,12.63 TP_SWDIO.TP 38.15,11.7 37.22,10.77 37.22,8.96 37.96,8.22 41,8.22 J2.2
SWO  (via drill 0.35)
  Top 0.156: U$1.P$AD22 32.14,10.99 31.93,10.78 v31.93,10.67 | v12.05,32.12 9.3,32.12 TP_SWO.TP
  Bottom 0.156: v31.93,10.67 33.89,12.64 33.89,13.61 34.25,13.96 35.94,13.96 36.16,13.74 38.74,13.74 42.88,17.88 42.88,24.03 42.09,24.82 23.81,24.82 23.14,24.15 22.5,24.15 22.08,24.57 22.08,25.87 21.39,26.56 18.02,26.56 16.4,24.93 16.02,24.93 15.75,25.2 15.75,28.42 v12.05,32.12
VBAT  (via drill 0.35)
  Top 0.156: IC1.C2 19.7,13.08 v19.03,13.75
  Top 0.3: U1.3 17.85,13.31 17.85,12.27 TP_VBAT.TP | U1.3 U1.2 | U1.3 16.6,13.37 17.63,13.37 18.01,13.75 v19.03,13.75 19,13.75 18.47,14.28 18.48,14.29 C37.2 | C27.1 19.62,15.68 v19.62,16.35
  Route15 0.3: 19.62,16.51 19.62,14.34 v19.03,13.75
VBUS  (via drill 0.35)
  Top 0.156: J4.A9_B4 20.6,27.58 20.05,27.04
  Top 0.3: C42.1 17.28,28.41 C43.1 20.05,27.04 v20.99,26.1 21.07,26.02 D3.5 | U$1.P$AD2 26.42,11.34 26.4,11.32 26.11,11.32 v25.88,11.09 | C38.2 18.49,9.81 19.3,10.63 19.3,11.06 19.84,11.6 | J4.A4_B9 25.62,28.75 25.62,28.29 25.85,28.06 v25.85,27.18 | IC1.A2 19.86,11.61 19.84,11.6 | 19.84,11.6 v19.8,11.6 | C21.1 26.39,8.12 v26.84,7.67
  Route15 0.3: v20.99,26.1 20.99,26.21 21.43,25.77 24.04,25.77 24.34,26.07 25.39,26.07 | 25.39,26.07 25.39,22.8 21.37,18.78 21.37,14.07 20.26,12.96 20.26,12.39 20.38,12.27 20.17,12.06 20.17,11.9 | 26.09,11.62 25.88,11.41 v25.88,11.09 | 26.2,11.52 26.09,11.62 | 22.14,11.22 22.14,9.59 22.89,8.84 24.63,8.84 25.79,7.67 v26.84,7.67 | 22.14,11.22 21.73,11.22 21.6,11.35 21.3,11.35 21.15,11.5 21.14,11.5 21.14,11.51 21.05,11.6 20.17,11.6 20.17,11.9 | 22.14,11.22 22.14,11.61 22.7,12.16 24.09,12.16 24.63,11.62 26.09,11.62 | 25.39,26.07 25.85,26.53 v25.85,27.18 | 20.17,11.9 19.87,11.6 v19.8,11.6
VREG  (via drill 0.35)
  Top 0.3: IC9.A3 IC9.A2 IC9.A1 29.62,6.46 28.73,6.46 28.6,6.34 v28.46,6.34 28.44,6.32 C23.1 27.63,6.37 C24.2 26.81,6.35 26.26,6.35 v26.13,6.48 | TP_VREG.TP 19.02,1.93 v19.02,1.48 | IC1.B2 19.81,12.63 18.86,12.63 17.49,11.26 17.49,10.01 | 17.49,10.01 C39.1 | 17.49,10.01 16.59,9.11 16.59,8.38 v16.69,8.28
  Route15 0.3: 16.33,1.73 16.23,1.73 14.5,3.46 8.49,3.46 8.05,3.9 8.05,6.28 9.85,8.08 16.21,8.08 16.41,8.28 | 16.33,1.73 16.75,1.31 18.86,1.31 18.86,1.82 20.09,3.04 20.54,3.04 20.81,3.3 25.19,3.3 25.32,3.18 25.35,3.18 26.13,3.96 26.13,6.07 25.9,6.3 26,6.3 26.18,6.47 28.33,6.47 v28.46,6.34 | v19.02,1.48 18.77,1.73 16.33,1.73
(copper drawn outside any net)
  shapes: Bottom area x1, Route15 area x1, Route2 area x1, Top area x1